# EAGLE board LedClock (EAGLE 7.6.0)
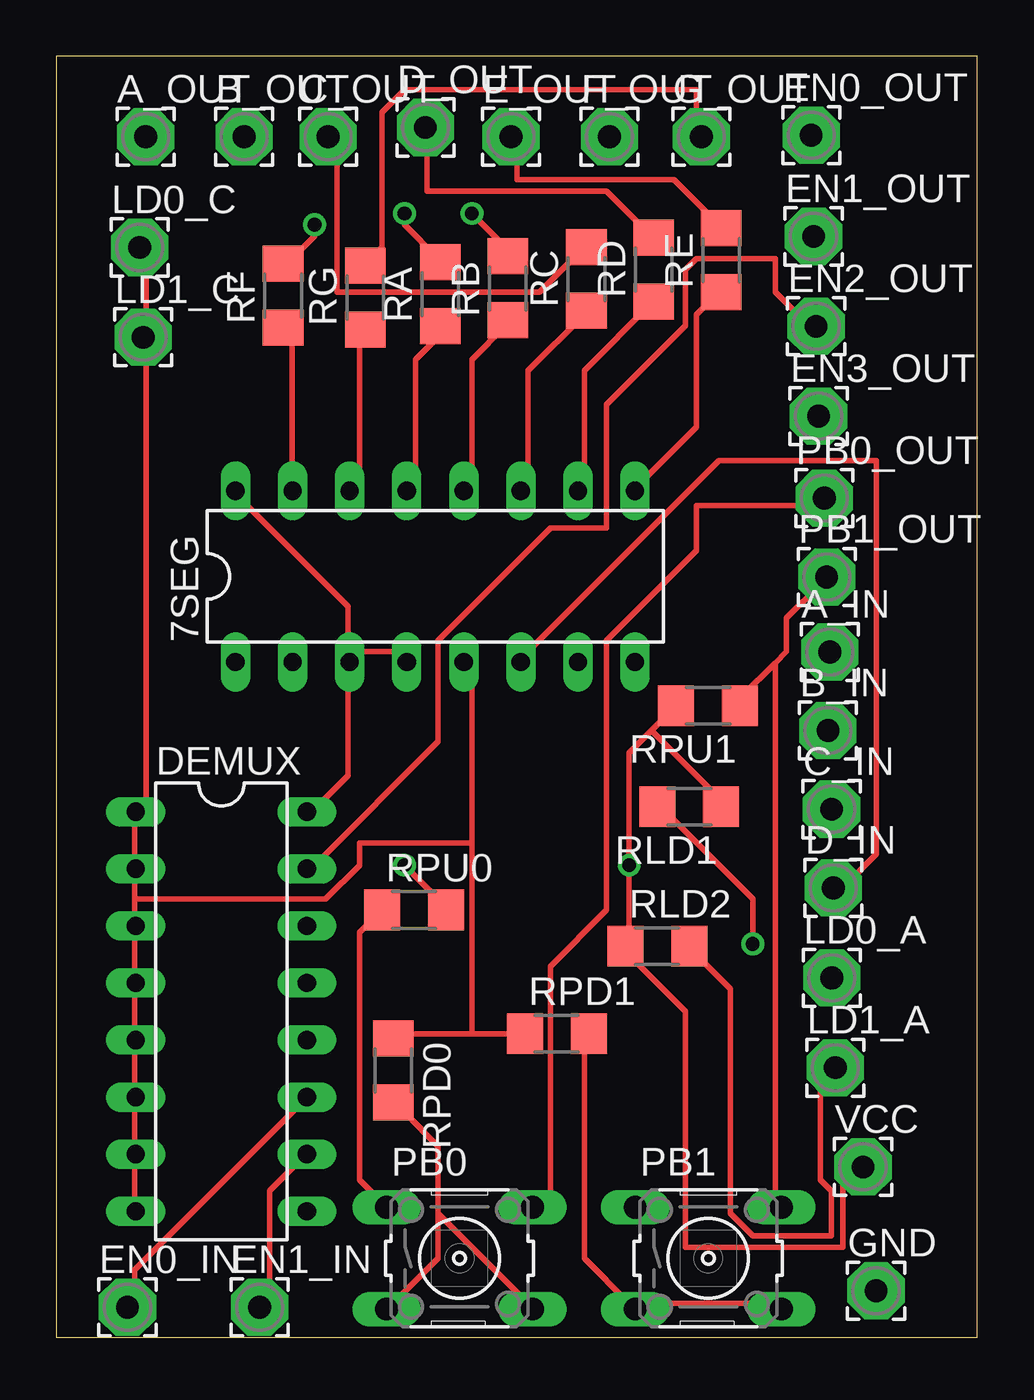
[diagram p0: board, top side]
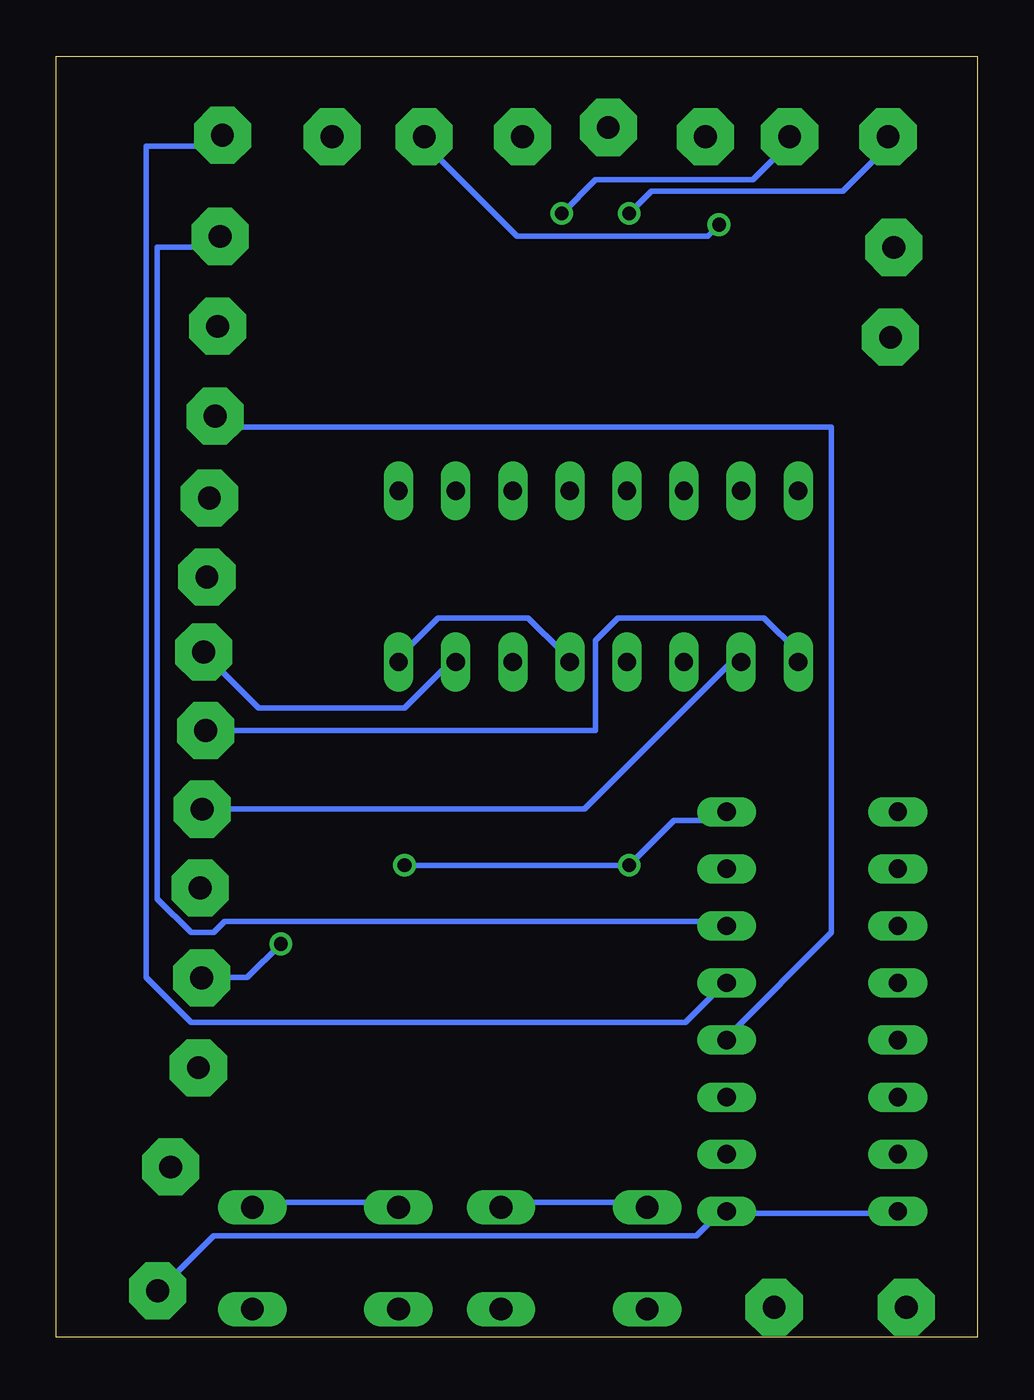
[diagram p1: board, bottom side, seen from below]

Size 41 x 57 mm. Coordinates in mm from the lower left corner, seen from the top.
Outline: 0,0 41,0 41,57 0,57 0,0
Copper layers (1*16): Top 0.035mm / dielectric 1.5mm / Bottom 0.035mm
Design rules "default": minimum track width 10mil, minimum drill 24mil, track to track 8mil, track to pad 8mil, pad to pad 8mil, via to via 8mil, smd to smd 8mil, copper to edge 40mil, drill to drill 8mil, minimum pad ring 10mil, minimum via ring 8mil, stop-mask expansion 4mil, vias tented up to drill 0mil, thermal gap 10mil

## Footprints (pad centres in the part's own frame; a part is rotated, then mirrored left to right if it is on the bottom)
DIL16 = drill 0.813 long: 1 -8.89,-3.81; 2 -6.35,-3.81; 3 -3.81,-3.81; 4 -1.27,-3.81; 5 1.27,-3.81; 6 3.81,-3.81; 7 6.35,-3.81; 8 8.89,-3.81; 9 8.89,3.81; 10 6.35,3.81; 11 3.81,3.81; 12 1.27,3.81; 13 -1.27,3.81; 14 -3.81,3.81; 15 -6.35,3.81; 16 -8.89,3.81
2,54/1,0 = drill 1.016 pad 2.54 octagon: 1 0,0
B3F-10XX = drill 1.016 long: 1 -3.251,2.261; 2 3.251,2.261; 3 -3.251,-2.261; 4 3.251,-2.261
R1206 = smd 1.6 x 1.803: 1 -1.422,0; 2 1.422,0

## Placement (x,y rotation side)
7SEG  4511N  [DIL16]  16.87,33.85 0 top
A_IN  [2,54/1,0]  34.43,30.49 0 top
A_OUT  [2,54/1,0]  3.98,53.41 0 top
B_IN  [2,54/1,0]  34.35,26.99 0 top
B_OUT  [2,54/1,0]  8.36,53.41 0 top
C_IN  [2,54/1,0]  34.51,23.49 0 top
C_OUT  [2,54/1,0]  12.1,53.41 0 top
D_IN  [2,54/1,0]  34.59,19.99 0 top
D_OUT  [2,54/1,0]  16.43,53.83 0 top
DEMUX  4051N  [DIL16]  7.35,14.49 270 top
E_OUT  [2,54/1,0]  20.24,53.41 0 top
EN0_IN  [2,54/1,0]  3.17,1.33 0 top
EN0_OUT  [2,54/1,0]  33.6,53.48 0 top
EN1_IN  [2,54/1,0]  9.05,1.33 0 top
EN1_OUT  [2,54/1,0]  33.71,48.98 0 top
EN2_OUT  [2,54/1,0]  33.82,44.98 0 top
EN3_OUT  [2,54/1,0]  33.93,40.98 0 top
F_OUT  [2,54/1,0]  24.62,53.41 0 top
G_OUT  [2,54/1,0]  28.72,53.41 0 top
GND  [2,54/1,0]  36.49,2.07 0 top
LD0_A  [2,54/1,0]  34.52,15.99 0 top
LD0_C  [2,54/1,0]  3.72,48.49 0 top
LD1_A  [2,54/1,0]  34.67,11.99 0 top
LD1_C  [2,54/1,0]  3.87,44.49 0 top
PB0  [B3F-10XX]  17.95,3.51 0 top
PB0_OUT  [2,54/1,0]  34.18,37.33 0 top
PB1  [B3F-10XX]  29.02,3.51 0 top
PB1_OUT  [2,54/1,0]  34.29,33.83 0 top
RA  220  [R1206]  17.1,46.41 90 top
RB  220  [R1206]  20.1,46.67 90 top
RC  220  [R1206]  23.6,47.09 90 top
RD  220  [R1206]  26.6,47.51 90 top
RE  220  [R1206]  29.6,47.93 90 top
RF  220  [R1206]  10.1,46.35 90 top
RG  220  [R1206]  13.75,46.26 90 top
RLD1  680  [R1206]  28.17,23.6 180 top
RLD2  680  [R1206]  26.75,17.4 0 top
RPD0  100  [R1206]  15.01,11.87 270 top
RPD1  100  [R1206]  22.28,13.51 0 top
RPU0  1M  [R1206]  15.93,19.01 0 top
RPU1  1M  [R1206]  29.01,28.1 180 top
VCC  [2,54/1,0]  35.91,7.57 0 top

## Library data of the parts
7SEG = 45xx
A_IN A_OUT B_IN B_OUT C_IN C_OUT D_IN D_OUT E_OUT EN0_IN EN0_OUT EN1_IN EN1_OUT EN2_OUT EN3_OUT F_OUT G_OUT GND LD0_A LD0_C LD1_A LD1_C PB0_OUT PB1_OUT VCC = wirepad
DEMUX = 40xx
PB0 PB1 = switch-omron; MPN: B3F-1000; OC_FARNELL: 176432; OC_NEWARK: 36M3542
RA RB RC RD RE RF RG RLD1 RLD2 RPD0 RPD1 RPU0 RPU1 = rcl

## Nets
A_IN: 7SEG.7 A_IN.1
A_OUT: A_OUT.1 RA.2
B_IN: 7SEG.1 B_IN.1
B_OUT: B_OUT.1 RB.2
C_IN: 7SEG.2 C_IN.1
C_OUT: C_OUT.1 RC.2
D_IN: 7SEG.6 D_IN.1
D_OUT: D_OUT.1 RD.2
E_OUT: E_OUT.1 RE.2
EN0_IN: DEMUX.11 EN0_IN.1
EN0_OUT: DEMUX.13 EN0_OUT.1
EN1_IN: DEMUX.10 EN1_IN.1
EN1_OUT: DEMUX.14 EN1_OUT.1
EN2_OUT: DEMUX.15 EN2_OUT.1
EN3_OUT: DEMUX.12 EN3_OUT.1
F_OUT: F_OUT.1 RF.2
G_OUT: G_OUT.1 RG.2
GND: 7SEG.5 7SEG.8 DEMUX.1 DEMUX.2 DEMUX.3 DEMUX.4 DEMUX.5 DEMUX.6 DEMUX.7 DEMUX.8 DEMUX.9 GND.1 LD0_C.1 LD1_C.1 RPD0.1 RPD1.1
LD0_A: LD0_A.1 RLD1.2
LD1_A: LD1_A.1 RLD2.2
N$1: PB1.3 PB1.4 RPD1.2
N$2: PB0.3 PB0.4 RPD0.2
N$8: 7SEG.13 RA.1
N$9: 7SEG.12 RB.1
N$10: 7SEG.11 RC.1
N$11: 7SEG.10 RD.1
N$12: 7SEG.9 RE.1
N$13: 7SEG.15 RF.1
N$14: 7SEG.14 RG.1
PB0_OUT: PB0.1 PB0.2 PB0_OUT.1 RPU0.1
PB1_OUT: PB1.1 PB1.2 PB1_OUT.1 RPU1.1
VCC: 7SEG.3 7SEG.4 7SEG.16 DEMUX.16 RLD1.1 RLD2.1 RPU0.2 RPU1.2 VCC.1

## Tracks (layer width: path | path; a pad name or v marks a point on that pad's centre or on a via)
A_IN
  Bottom 0.254: 7SEG.7 23.5,30 25.5,28 32,28 34,30 A_IN.1
A_OUT  (via drill 0.61)
  Top 0.254: v15.5,50 15.5,49.5 17,48 RA.2
  Bottom 0.254: v15.5,50 14.5,51 6,51 4,53 A_OUT.1
B_IN
  Bottom 0.254: 7SEG.1 8,30.5 9.5,32 16,32 17,31 17,27 34,27 B_IN.1
B_OUT  (via drill 0.61)
  Top 0.254: v18.5,50 20,48.5 RB.2
  Bottom 0.254: v18.5,50 17,51.5 10,51.5 8.5,53 B_OUT.1
C_IN
  Bottom 0.254: 7SEG.2 11,30 17.5,23.5 C_IN.1
C_OUT
  Top 0.254: RC.2 23.5,48.5 21.5,46.5 12.5,46.5 12.5,53 C_OUT.1
D_IN
  Top 0.254: 7SEG.6 21,30.5 29.5,39 36.5,39 36.5,21.5 35,20 D_IN.1
D_OUT
  Top 0.254: RD.2 26.5,49 24.5,51 16.5,51 16.5,53.5 D_OUT.1
E_OUT
  Top 0.254: RE.2 29.5,49.5 27.5,51.5 20.5,51.5 20.5,53 E_OUT.1
EN0_IN
  Top 0.254: DEMUX.11 11,10.5 3.5,3 3.5,1.5 EN0_IN.1
EN0_OUT
  Bottom 0.254: DEMUX.13 11.5,15.5 13,14 35,14 37,16 37,53 34,53 EN0_OUT.1
EN1_IN
  Top 0.254: DEMUX.10 11,8 9.5,6.5 9.5,1.5 EN1_IN.1
EN1_OUT
  Bottom 0.254: DEMUX.14 11.5,18.5 33.5,18.5 34,18 35,18 36.5,19.5 36.5,48.5 34,48.5 EN1_OUT.1
EN2_OUT
  Top 0.254: DEMUX.15 11.5,21 17,26.5 17,31 22,36 24.5,36 24.5,41.5 28,45 28,47.5 28.5,48 32,48 32,46.5 33.5,45 EN2_OUT.1
EN3_OUT
  Bottom 0.254: DEMUX.12 11,13.5 6.5,18 6.5,40.5 33.5,40.5 EN3_OUT.1
F_OUT  (via drill 0.61)
  Top 0.254: v11.5,49.5 11.5,49 10.5,48 RF.2
  Bottom 0.254: v11.5,49.5 12,49 20.5,49 24.5,53 F_OUT.1
G_OUT
  Top 0.254: RG.2 14,48 14.5,48.5 14.5,54.5 15.5,55.5 28.5,55.5 28.5,53.5 G_OUT.1
GND
  Top 0.254: 18.5,13.5 20.5,13.5 RPD1.1 | 18.5,13.5 15.5,13.5 RPD0.1 | 18.5,22 18.5,30 7SEG.5 | 18.5,22 18.5,13.5 | LD0_C.1 4,48 4,44.5 LD1_C.1 4,44 4,23.5 DEMUX.1 3.5,23 3.5,21 DEMUX.2 3.5,20.5 3.5,19.5 | DEMUX.8 3.5,6 3.5,8 DEMUX.7 3.5,8.5 3.5,10.5 DEMUX.6 3.5,11 3.5,13 DEMUX.5 3.5,13.5 3.5,15.5 DEMUX.4 3.5,16 3.5,18 DEMUX.3 3.5,18.5 3.5,19.5 | 18.5,22 13.5,22 13.5,21 12,19.5 3.5,19.5
  Bottom 0.254: 7SEG.5 18.5,30.5 20,32 24,32 25.5,30.5 7SEG.8 | DEMUX.8 4,5.5 11,5.5 DEMUX.9 11.5,5.5 12.5,4.5 34,4.5 36,2.5 GND.1
LD0_A  (via drill 0.61)
  Top 0.254: v31,17.5 31,19.5 27,23.5 RLD1.2
  Bottom 0.254: v31,17.5 32.5,16 34.5,16 LD0_A.1
LD1_A
  Top 0.254: RLD2.2 28.5,17 30,15.5 30,5.5 31,4.5 34.5,4.5 34.5,6.5 34,7 34,11 34.5,11.5 LD1_A.1
N$1
  Top 0.254: RPD1.2 23.5,13.5 23.5,3.5 25.5,1.5 PB1.3 26,1.5 32,1.5 PB1.4
N$2
  Top 0.254: 17,5.5 17,3.5 15,1.5 PB0.3 | 17,5.5 17,8.5 15.5,10 RPD0.2 | 17,5.5 21,1.5 PB0.4
N$8
  Top 0.254: RA.1 17,44.5 16,43.5 16,38 7SEG.13
N$9
  Top 0.254: RB.1 20,45 18.5,43.5 18.5,38 7SEG.12
N$10
  Top 0.254: RC.1 23.5,45.5 21,43 21,38 7SEG.11
N$11
  Top 0.254: RD.1 26.5,46 23.5,43 23.5,38 7SEG.10
N$12
  Top 0.254: RE.1 29.5,46.5 28.5,45.5 28.5,40.5 26,38 7SEG.9
N$13
  Top 0.254: RF.1 10.5,44.5 10.5,38 7SEG.15
N$14
  Top 0.254: RG.1 13.5,44.5 13.5,38 7SEG.14
PB0_OUT
  Top 0.254: RPU0.1 13.5,18 13.5,7 14.5,6 PB0.1 | PB0_OUT.1 34,37 28.5,37 28.5,35 24.5,31 24.5,19 22,16.5 22,6.5 21.5,6 PB0.2
  Bottom 0.254: PB0.2 21,6 15,6 PB0.1
PB1_OUT
  Top 0.254: 32,30 32.5,30.5 32.5,32 34,33.5 PB1_OUT.1 | 32,30 30.5,28.5 RPU1.1 | 32,30 32,6 PB1.2
  Bottom 0.254: PB1.1 26,6 32,6 PB1.2
VCC  (via drill 0.61)
  Top 0.254: v15.5,21 17,19.5 RPU0.2 | 7SEG.3 13.5,30.5 15.5,30.5 7SEG.4 | 7SEG.16 8,37.5 13,32.5 13,30.5 7SEG.3 | DEMUX.16 11.5,23.5 13,25 13,30 7SEG.3 | 26.5,27 27.5,28 RPU1.2 | 26.5,27 25.5,26 v25.5,21 25.5,17.5 RLD2.1 25.5,17 28,14.5 28,4 35,4 35,7 35.5,7.5 VCC.1 | 26.5,27 29.5,24 RLD1.1
  Bottom 0.254: DEMUX.16 11.5,23 13.5,23 v15.5,21 v25.5,21